# Altium PCB Connector Locations.PcbDoc
Units mil, origin at the board's own origin, x right, y up, seen from the top; angles counter-clockwise.
Board outline 2150 x 1650 mil, 2 copper layers (Top Layer, Bottom Layer); 12 components, 0 nets, 184 pads, 0 vias.
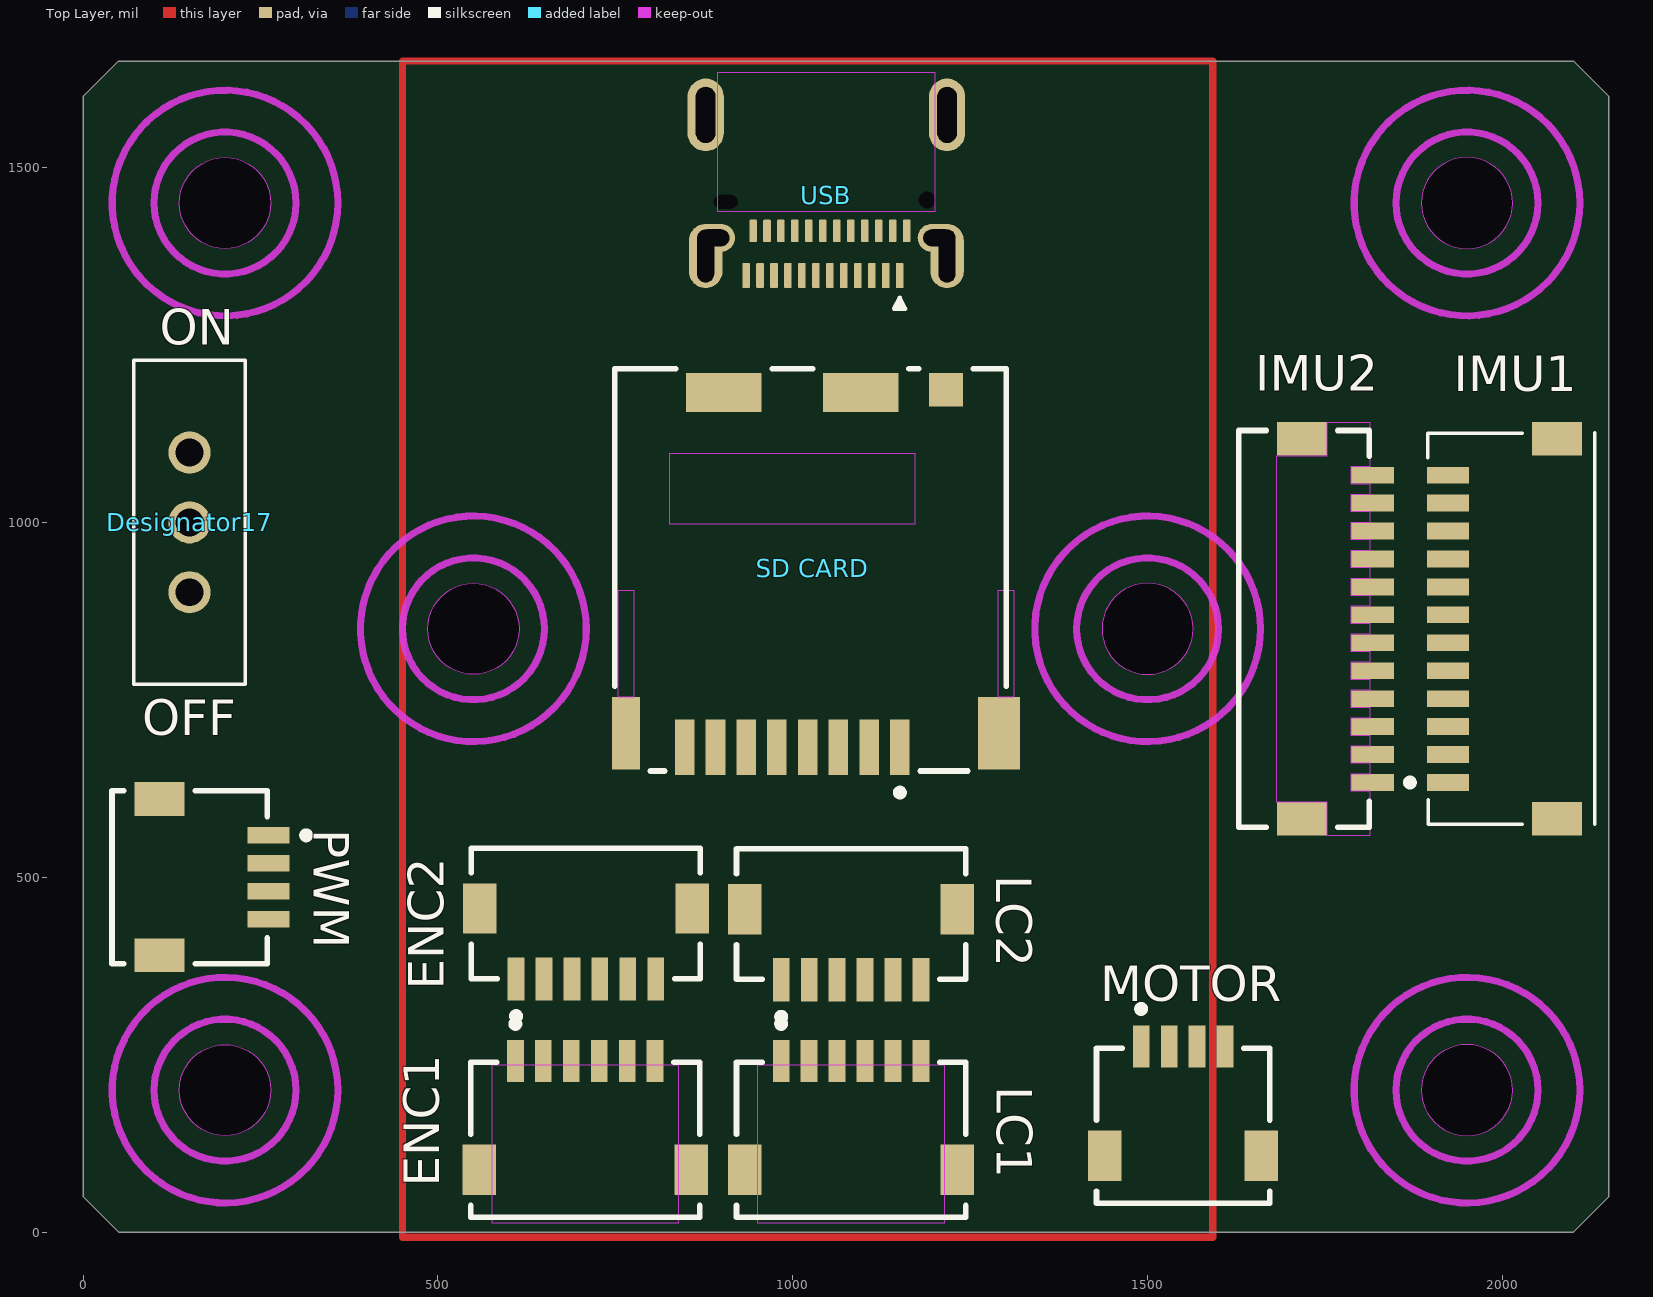
[diagram p0: Top Layer view]
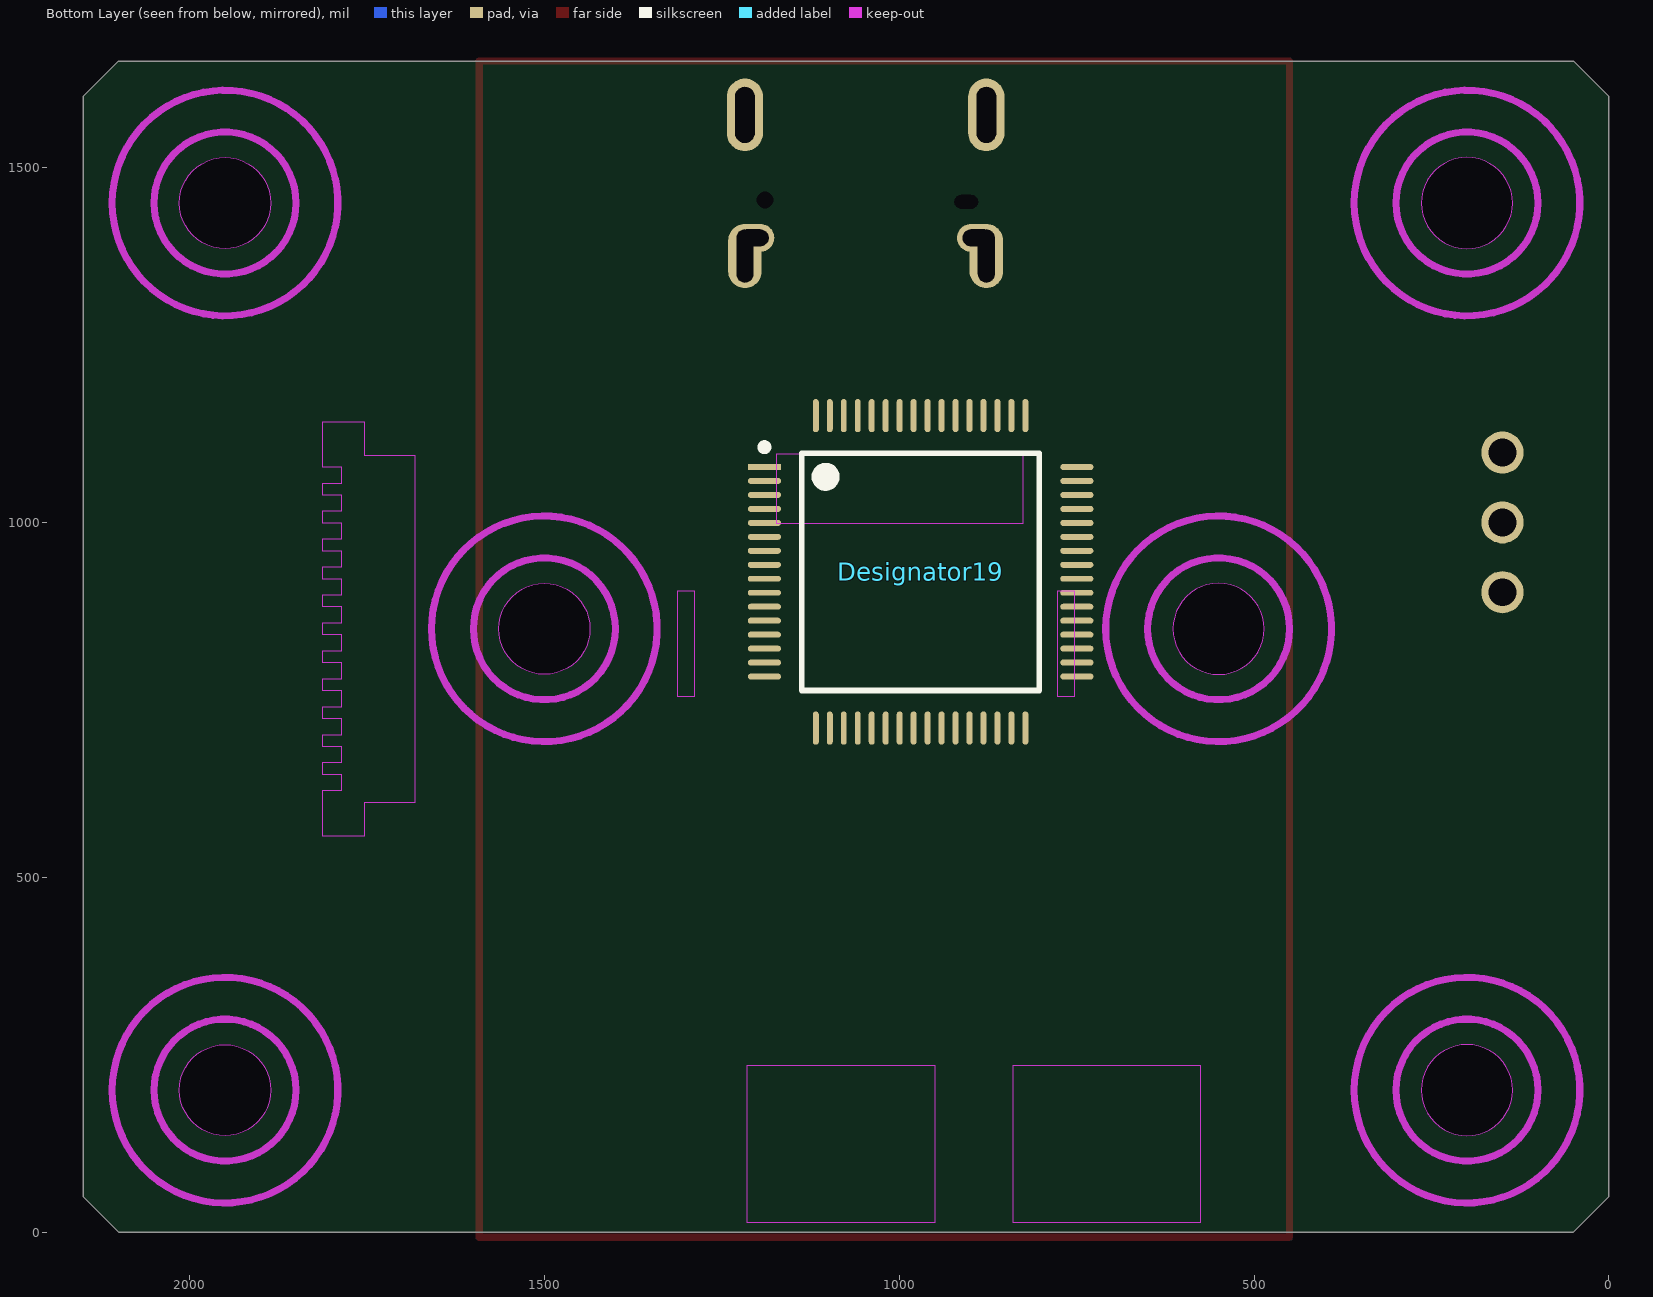
[diagram p1: Bottom Layer view, seen from below]

## Layer stack, top to bottom
Top Solder: solder mask 0.4, Solder Resist, Dk 3.5
Top Layer: signal copper 1.4
Dielectric 1: dielectric 12.6, FR-4, Dk 4.8
Bottom Layer: signal copper 1.4
Bottom Solder: solder mask 0.4, Solder Resist, Dk 3.5

## Board outline
0,50 0,1600 50,1650 2100,1650 2150,1600 2150,50 2100,0 50,0
cut-out: 1435.75,850 ccw(c1500,850) 1500,785.75 ccw(c1500,850) 1564.25,850 ccw(c1500,850) 1500,914.25 ccw(c1500,850)
cut-out: 550,785.75 cw(c550,850) 485.75,850 cw(c550,850) 550,914.25 cw(c550,850) 614.25,850 cw(c550,850)
cut-out: 1885.75,200 ccw(c1950,200) 1950,135.75 ccw(c1950,200) 2014.25,200 ccw(c1950,200) 1950,264.25 ccw(c1950,200)
cut-out: 1885.75,1450 ccw(c1950,1450) 1950,1385.75 ccw(c1950,1450) 2014.25,1450 ccw(c1950,1450) 1950,1514.25 ccw(c1950,1450)
cut-out: 200,1385.75 cw(c200,1450) 135.75,1450 cw(c200,1450) 200,1514.25 cw(c200,1450) 264.25,1450 cw(c200,1450)
cut-out: 200,135.75 cw(c200,200) 135.75,200 cw(c200,200) 200,264.25 cw(c200,200) 264.25,200 cw(c200,200)

## Design rules (kind name [scope] priority, off if disabled: settings)
Clearance [All] p1: gap=10 ignorepadtopadclearanceinfootprint=FALSE
PolygonConnect [All] p1: connectstyle=Relief reliefconductorwidth=10 reliefentries=4 polygonreliefangle="90 Angle" airgapwidth=10
RoutingVias [All] p1: holewidth=28 width=50 viastyle="Through Hole" minholewidth=28 minwidth=50 maxholewidth=28 maxwidth=50
SolderMaskExpansion [All] p1: expansion=4 istentingtop=FALSE
Width [All] p1: maxlimit=10 minlimit=10 preferedwidth=10
30 further rules are at their usual default settings.

## Components (designator, comment, footprint, x,y, rotation, side; value= is the part's Value field where it differs from the comment)
Designator17 "Comment" SW_EG1218 150,1000 r270 top
Designator19 "Comment" FP-LQFP64-5W-IPC_C 969.87,930.38 r180 bottom
ENC1 "Comment" FP-203559-0607-MFG 707.62,129.98 r0 top
ENC2 "Comment" FP-501331-0607-MFG 708.47,449 r180 top
IMU1 "Comment" MOLEX_5015681207 2000,850 r90 top
IMU2 "Comment" FP-501331-1207-MFG 1720.43,850 r270 top
LC1 "Comment" FP-203559-0607-MFG 1082.09,129.98 r0 top
LC2 "Comment" FP-501331-0607-MFG 1082.14,448.04 r180 top
MOTOR "Comment" FP-501568-0407-MFG 1550,150 r0 top
PWM "Comment" FP-501568-0407-MFG 150,500 r270 top
"SD CARD" "Comment" FP-DM3CS-SF-MFG 1024.96,933.2 r0 top
USB "Comment" JAE-DX07S024JJ3_V 1047.35,1454.1 r180 top

## Footprints (in the part's own frame and the unit in brackets; to place one, negate y for a bottom-side part, rotate by r counter-clockwise, add the part's x,y. Pads: shape width x height; smd on the part's side, far side on the other; paste and mask are expansions set on the pad)
FP-203559-0607-MFG [mm]
  rect 0.6x1.5 smd paste-1000 mask+0: 1(-2.5,2.825) 2(-1.5,2.825) 3(-0.5,2.825) 4(0.5,2.825) 5(1.5,2.825) 6(2.5,2.825)
  rect 1.2x1.8 smd paste-1000 mask+0: 7(-3.8,-1.075) 8(3.8,-1.075)
  Keep-Out Layer region: -3.35,-2.975 3.35,-2.975 3.35,2.675 -3.35,2.675
  silkscreen extent -4.1,-2.78 4.1,4.27, body extent -4.5,-2.98 4.5,3.67, height 0.25
FP-501331-0607-MFG [mm]
  rect 0.6x1.55 smd paste+0 mask+0: 1(2.5,2.35) 2(1.5,2.35) 3(0.5,2.35) 4(-0.5,2.35) 5(-1.5,2.35) 6(-2.5,2.35)
  rect 1.2x1.8 smd paste+0 mask+0: 7(-3.8,-0.175) 8(3.8,-0.175)
  silkscreen extent -4.1,-2.33 4.1,3.8, body extent -4.5,-2.43 4.5,3.22, height 0.25
FP-501331-1207-MFG [mm]
  rect 0.6x1.55 smd paste+0 mask+0: 1(5.5,2.45) 2(4.5,2.45) 3(3.5,2.45) 4(2.5,2.45) 5(1.5,2.45) 6(0.5,2.45) 7(-0.5,2.45) 8(-1.5,2.45) 9(-2.5,2.45) 10(-3.5,2.45) 11(-4.5,2.45) 12(-5.5,2.45)
  rect 1.2x1.8 smd paste+0 mask+0: 13(-6.8,-0.075) 14(6.8,-0.075)
  Keep-Out Layer region: -7.4,0.825 -7.4,2.355 -5.8,2.355 -5.8,1.675 -5.2,1.675 -5.2,2.355 -4.8,2.355 -4.8,1.675 -4.2,1.675 -4.2,2.355 -3.8,2.355 -3.8,1.675 -3.2,1.675 -3.2,2.355 -2.8,2.355 -2.8,1.675 -2.2,1.675 -2.2,2.355 -1.8,2.355 -1.8,1.675 -1.2,1.675 -1.2,2.355 -0.8,2.355 -0.8,1.675 -0.2,1.675 -0.2,2.355 0.2,2.355 0.2,1.675 0.8,1.675 0.8,2.355 1.2,2.355 1.2,1.675 1.8,1.675 1.8,2.355 2.2,2.355 2.2,1.675 2.8,1.675 2.8,2.355 3.2,2.355 3.2,1.675 3.8,1.675 3.8,2.355 4.2,2.355 4.2,1.675 4.8,1.675 4.8,2.355 5.2,2.355 5.2,1.675 5.8,1.675 5.8,2.355 7.4,2.355 7.4,0.825 6.2,0.825 6.2,-0.975 -6.2,-0.975 -6.2,0.825
  silkscreen extent -7.1,-2.33 7.1,3.92, body extent -7.5,-2.43 7.5,3.32, height 0.25
FP-501568-0407-MFG [mm]
  rect 0.6x1.5 smd paste+0 mask+0: 1(-1.5,2.825) 2(-0.5,2.825) 3(0.5,2.825) 4(1.5,2.825)
  rect 1.2x1.8 smd paste+0 mask+0: 5(-2.8,-1.075) 6(2.8,-1.075)
  silkscreen extent -3.1,-2.78 3.1,4.3, body extent -3.5,-2.88 3.5,3.67, height 0.25
FP-DM3CS-SF-MFG [mm]
  rect 0.7x2 smd paste+0 mask+0: 1(3.2,-6.35) 2(2.1,-6.35) 3(1,-6.35) 4(-0.1,-6.35) 5(-1.2,-6.35) 6(-2.3,-6.35) 7(-3.4,-6.35) 8(-4.5,-6.35)
  rect 2.7x1.4 smd paste+0 mask+0: 9(-3.1,6.35) 10(1.8,6.35)
  rect 1.2x1.2 smd paste+0 mask+0: 11(4.85,6.45)
  rect 1x2.6 smd paste+0 mask+0: 12(-6.6,-5.85)
  rect 1.5x2.6 smd paste+0 mask+0: 13(6.75,-5.85)
  Keep-Out Layer region: -5.05,1.65 3.75,1.65 3.75,4.15 -5.05,4.15
  Keep-Out Layer region: 6.7,-4.55 7.3,-4.55 7.3,-0.75 6.7,-0.75
  Keep-Out Layer region: -6.9,-4.55 -6.3,-4.55 -6.3,-0.75 -6.9,-0.75
  silkscreen extent -7,-8.1 7,7.2, body extent -7.2,-7.45 7.6,7.3, height 0.25
FP-LQFP64-5W-IPC_C [mm]
  rect 1.188x0.212 smd paste+0 mask+0: 1(-5.591,3.75)
  rrect100% 1.188x0.212 smd paste+0 mask+0: 2(-5.591,3.25) 3(-5.591,2.75) 4(-5.591,2.25) 5(-5.591,1.75) 6(-5.591,1.25) 7(-5.591,0.75) 8(-5.591,0.25) 9(-5.591,-0.25) 10(-5.591,-0.75) 11(-5.591,-1.25) 12(-5.591,-1.75) 13(-5.591,-2.25) 14(-5.591,-2.75) 15(-5.591,-3.25) 16(-5.591,-3.75) 33(5.591,-3.75) 34(5.591,-3.25) 35(5.591,-2.75) 36(5.591,-2.25) 37(5.591,-1.75) 38(5.591,-1.25) 39(5.591,-0.75) 40(5.591,-0.25) 41(5.591,0.25) 42(5.591,0.75) 43(5.591,1.25) 44(5.591,1.75) 45(5.591,2.25) 46(5.591,2.75) 47(5.591,3.25) 48(5.591,3.75)
  rrect100% 0.212x1.188 smd paste+0 mask+0: 17(-3.75,-5.591) 18(-3.25,-5.591) 19(-2.75,-5.591) 20(-2.25,-5.591) 21(-1.75,-5.591) 22(-1.25,-5.591) 23(-0.75,-5.591) 24(-0.25,-5.591) 25(0.25,-5.591) 26(0.75,-5.591) 27(1.25,-5.591) 28(1.75,-5.591) 29(2.25,-5.591) 30(2.75,-5.591) 31(3.25,-5.591) 32(3.75,-5.591) 49(3.75,5.591) 50(3.25,5.591) 51(2.75,5.591) 52(2.25,5.591) 53(1.75,5.591) 54(1.25,5.591) 55(0.75,5.591) 56(0.25,5.591) 57(-0.25,5.591) 58(-0.75,5.591) 59(-1.25,5.591) 60(-1.75,5.591) 61(-2.25,5.591) 62(-2.75,5.591) 63(-3.25,5.591) 64(-3.75,5.591)
  silkscreen extent -5.72,-4.25 4.25,4.58, body extent -6,-6 6,6, height 1.6
JAE-DX07S024JJ3_V [mm] "THD, 24-Leads, Body 8.17x8.94mm, Pitch 0.5mm"
  oval 1.2x2.3 hole 0.6 slot 1.9 at 90 deg: 1(-4.32,2) 2(4.32,2)
  oval 1.5x1 hole 0.6 slot 1.1 at 0 deg: 1(-4.02,1.35) 2(4.02,1.35)
  oval 1.3x2.6 hole 0.7 slot 2 at 90 deg: 3(-4.32,-3.05) 4(4.32,-3.05)
  rrect25% 0.27x0.9 smd: A1(-2.625,2.7) A2(-2.125,2.7) A3(-1.625,2.7) A4(-1.125,2.7) A5(-0.625,2.7) A6(-0.125,2.7) A7(0.375,2.7) A8(0.875,2.7) A9(1.375,2.7) A10(1.875,2.7) A11(2.375,2.7) A12(2.875,2.7)
  rrect25% 0.27x0.8 smd: B1(2.625,1.1) B2(2.125,1.1) B3(1.625,1.1) B4(1.125,1.1) B5(0.625,1.1) B6(0.125,1.1) B7(-0.375,1.1) B8(-0.875,1.1) B9(-1.375,1.1) B10(-1.875,1.1) B11(-2.375,1.1) B12(-2.875,1.1)
  round 0 hole 0.6 unplated: H1(-3.6,0)
  round 0 hole 0.5 slot 0.85 at 0 deg unplated: H2(3.6,0.065)
  Top Layer keep-out region: -3.9,-4.55 3.9,-4.55 3.9,0.4 -3.9,0.4
  silkscreen extent -2.83,3.49 -2.43,3.89, body extent -4.47,-5.35 4.47,2.8, height 3.16
MOLEX_5015681207 [mm]
  rect 0.6x1.5 smd mask+0.076: 1(-5.5,1.95) 2(-4.5,1.95) 3(-3.5,1.95) 4(-2.5,1.95) 5(-1.5,1.95) 6(-0.5,1.95) 7(0.5,1.95) 8(1.5,1.95) 9(2.5,1.95) 10(3.5,1.95) 11(4.5,1.95) 12(5.5,1.95)
  rect 1.2x1.8 smd mask+0.076: S1(6.8,-1.95) S2(-6.8,-1.95)
  silkscreen extent -7,-3.3 7.02,2.67, body extent -7,-3.27 7,2.63, height 4.71
SW_EG1218 [mm]
  round 1.508 hole 1 mask+0.05: 1(-2.5,0) 2(0,0) 3(2.5,0)
  silkscreen extent -5.8,-2 5.8,2, body extent -5.8,-2 5.8,2, height 7.41

## Nets (pads, with @x,y where several pads share a name; then routed paths per layer and width w, separated by ;. In a path a pad name is that pad's centre, name@x,y a point inside that pad or via, vN(x,y) a via of type N, cw(c..) or ccw(c..) an arc to the next point about the centre after c; other vN are vias at no path point)
pads on no net: "SD CARD.1" "SD CARD.2" "SD CARD.3" "SD CARD.4" "SD CARD.5" "SD CARD.6" "SD CARD.7" "SD CARD.8" "SD CARD.9" "SD CARD.10" "SD CARD.11" "SD CARD.12" "SD CARD.13" Designator17.1 Designator17.2 Designator17.3 Designator19.1 Designator19.2 Designator19.3 Designator19.4 Designator19.5 Designator19.6 Designator19.7 Designator19.8 Designator19.9 Designator19.10 Designator19.11 Designator19.12 Designator19.13 Designator19.14 Designator19.15 Designator19.16 Designator19.17 Designator19.18 Designator19.19 Designator19.20 Designator19.21 Designator19.22 Designator19.23 Designator19.24 Designator19.25 Designator19.26 Designator19.27 Designator19.28 Designator19.29 Designator19.30 Designator19.31 Designator19.32 Designator19.33 Designator19.34 Designator19.35 Designator19.36 Designator19.37 Designator19.38 Designator19.39 Designator19.40 Designator19.41 Designator19.42 Designator19.43 Designator19.44 Designator19.45 Designator19.46 Designator19.47 Designator19.48 Designator19.49 Designator19.50 Designator19.51 Designator19.52 Designator19.53 Designator19.54 Designator19.55 Designator19.56 Designator19.57 Designator19.58 Designator19.59 Designator19.60 Designator19.61 Designator19.62 Designator19.63 Designator19.64 ENC1.1 ENC1.2 ENC1.3 ENC1.4 ENC1.5 ENC1.6 ENC1.7 ENC1.8 ENC2.1 ENC2.2 ENC2.3 ENC2.4 ENC2.5 ENC2.6 ENC2.7 ENC2.8 IMU1.1 IMU1.2 IMU1.3 IMU1.4 IMU1.5 IMU1.6 IMU1.7 IMU1.8 IMU1.9 IMU1.10 IMU1.11 IMU1.12 IMU1.S1 IMU1.S2 IMU2.1 IMU2.2 IMU2.3 IMU2.4 IMU2.5 IMU2.6 IMU2.7 IMU2.8 IMU2.9 IMU2.10 IMU2.11 IMU2.12 IMU2.13 IMU2.14 LC1.1 LC1.2 LC1.3 LC1.4 LC1.5 LC1.6 LC1.7 LC1.8 LC2.1 LC2.2 LC2.3 LC2.4 LC2.5 LC2.6 LC2.7 LC2.8 MOTOR.1 MOTOR.2 MOTOR.3 MOTOR.4 MOTOR.5 MOTOR.6 PWM.1 PWM.2 PWM.3 PWM.4 PWM.5 PWM.6 USB.1 USB.2 USB.3 USB.4 USB.A1 USB.A2 USB.A3 USB.A4 USB.A5 USB.A6 USB.A7 USB.A8 USB.A9 USB.A10 USB.A11 USB.A12 USB.B1 USB.B2 USB.B3 USB.B4 USB.B5 USB.B6 USB.B7 USB.B8 USB.B9 USB.B10 USB.B11 USB.B12 USB.H1 USB.H2
copper on no net: | length 5598.1
  Top Layer w10: 450,-7.32 1591.73,-7.32 1591.73,1650 450,1650 450,-7.32

## Keep-outs
Keep-Out Layer:
  circle w10: c550,850 r100
  circle w10: c1500,850 r100
  circle w10: c200,200 r100
  circle w10: c1950,200 r100
  circle w10: c1950,1450 r100
  circle w10: c200,1450 r100
  circle w10: c550,850 r159
  circle w10: c1500,850 r159
  circle w10: c1950,200 r159
  circle w10: c200,200 r159
  circle w10: c1950,1450 r159
  circle w10: c200,1450 r159

## Silkscreen, mask and mechanical layers (free items; w line width, h text height)
Top Overlay:
  text "ON" at 108.35,1250.01 h50
  text "OFF" at 83.35,700.01 h50
Board:
  circle w10: c550,850 r64.25
  circle w10: c1500,850 r64.25
  circle w10: c1950,1450 r64.25
  circle w10: c200,200 r64.25
  circle w10: c1950,200 r64.25
  circle w10: c200,1450 r64.25
  lines w10: 0,50 50,0 2100,0 2150,50 2150,1600 2100,1650 50,1650 0,1600 0,50

## Text inside footprints (layer, text, board x,y; h text height)
USB: Top 3D Body "Board Edge" at 1090.65,1662.76 h19.68 r180